# EAGLE board GrblMainboard - v2.1 (EAGLE 6.3)
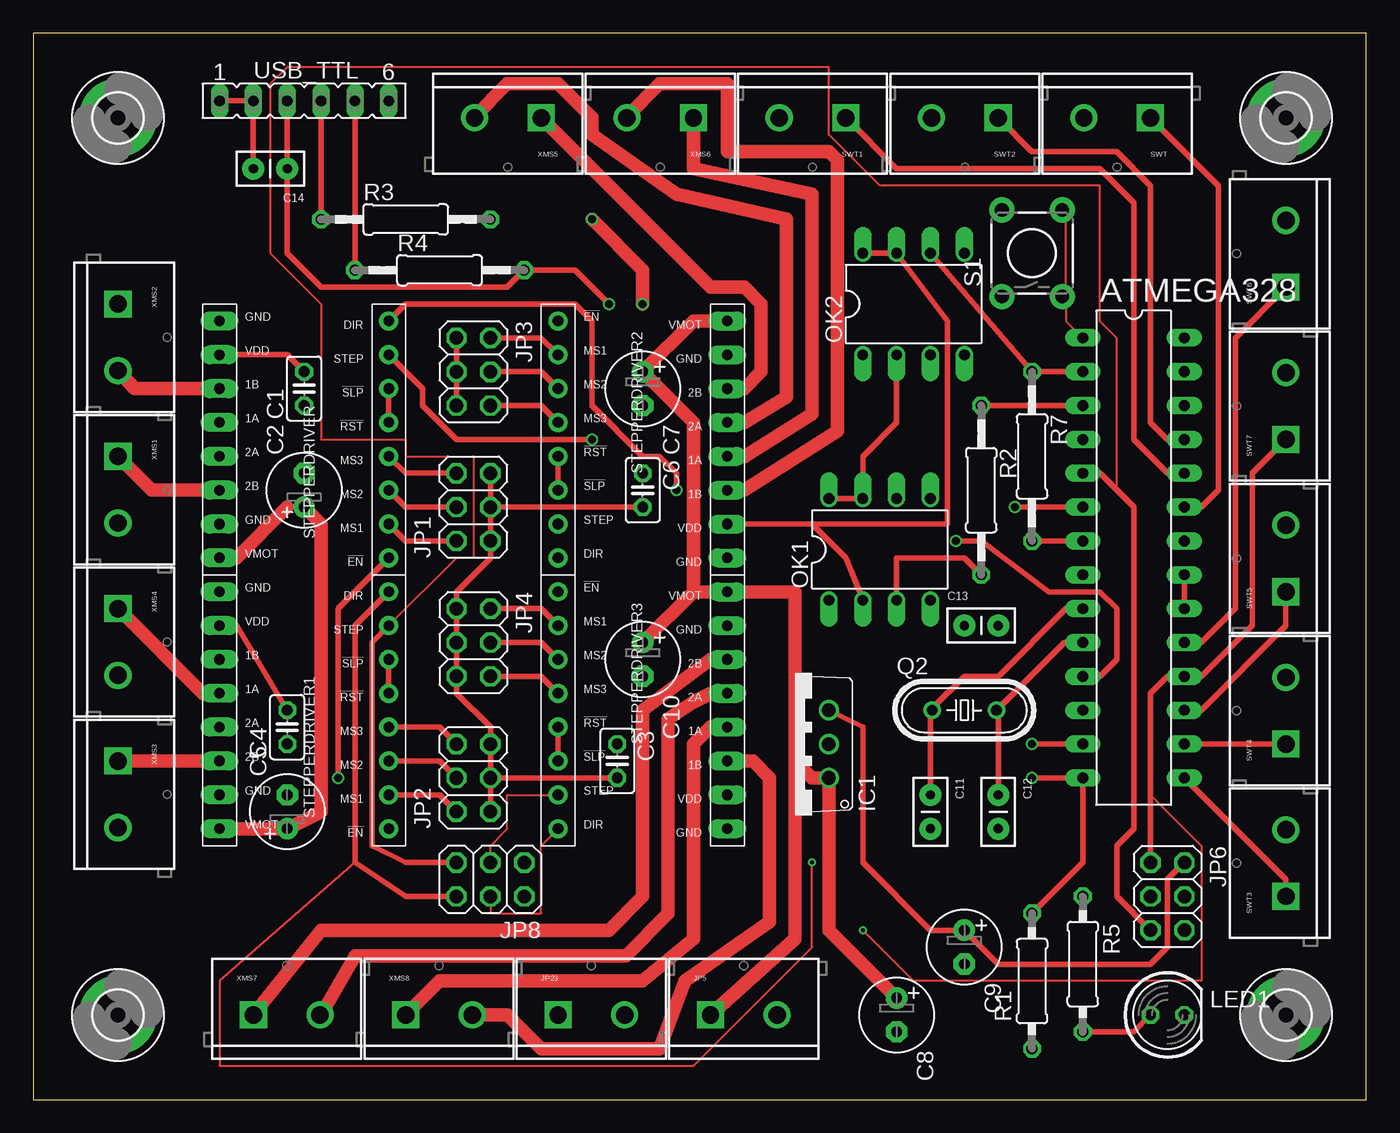
[diagram p0: board, top side]
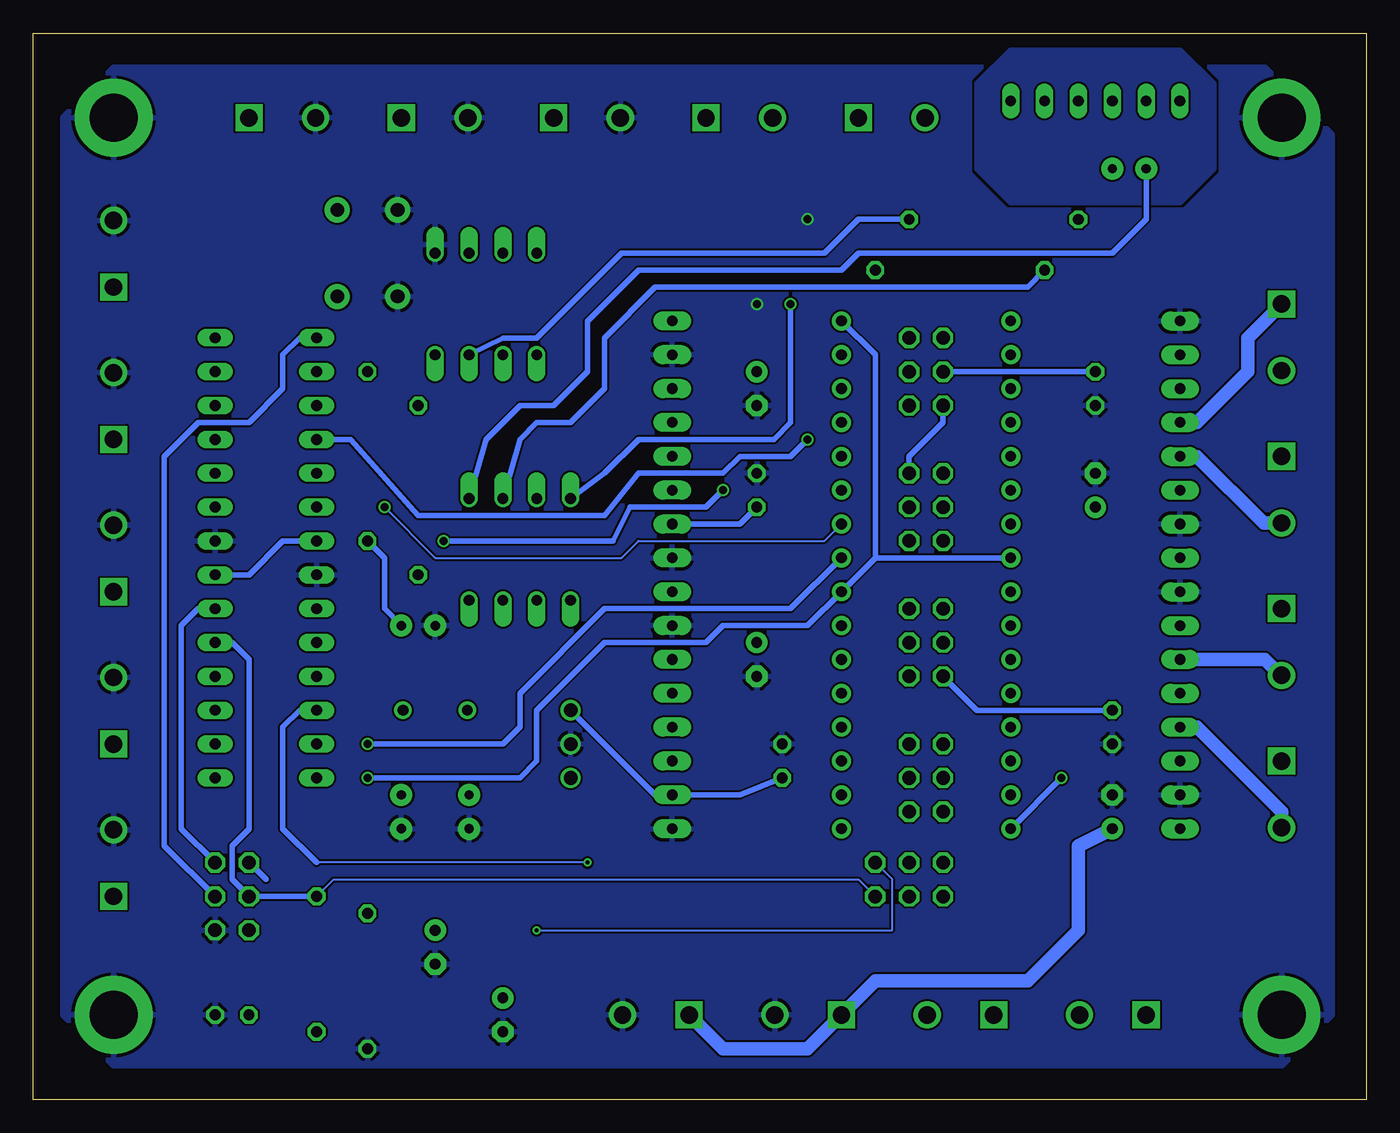
[diagram p1: board, bottom side, seen from below]

Size 100 x 80 mm. Coordinates in mm from the lower left corner, seen from the top.
Outline: 0,0 100,0 100,80 0,80 0,0
Copper layers (1*16): Top 0.035mm / dielectric 1.5mm / Bottom 0.035mm
Design rules "ITEADstudio_DRC": minimum track width 6mil, minimum drill 12mil, track to track 6mil, track to pad 6mil, pad to pad 6mil, via to via 6mil, smd to smd 0mil, copper to edge 10mil, drill to drill 10mil, minimum pad ring 10mil, minimum via ring 6mil, stop-mask expansion 2mil, vias tented up to drill 100mil, thermal gap 10mil

## Footprints (pad centres in the part's own frame; a part is rotated, then mirrored left to right if it is on the bottom)
DIL28-3 = drill 0.813 long: 1 -16.51,-3.81; 2 -13.97,-3.81; 3 -11.43,-3.81; 4 -8.89,-3.81; 5 -6.35,-3.81; 6 -3.81,-3.81; 7 -1.27,-3.81; 8 1.27,-3.81; 9 3.81,-3.81; 10 6.35,-3.81; 11 8.89,-3.81; 12 11.43,-3.81; 13 13.97,-3.81; 14 16.51,-3.81; 15 16.51,3.81; 16 13.97,3.81; 17 11.43,3.81; 18 8.89,3.81; 19 6.35,3.81; 20 3.81,3.81; 21 1.27,3.81; 22 -1.27,3.81; 23 -3.81,3.81; 24 -6.35,3.81; 25 -8.89,3.81; 26 -11.43,3.81; 27 -13.97,3.81; 28 -16.51,3.81
C025-025X050 = drill 0.813 octagon: 1 -1.27,0; 2 1.27,0
E2,5-6 = drill 0.813 pad 1.6: + -1.27,0 | drill 0.813 pad 1.6 octagon: - 1.27,0
CAP-PTH-SMALL2 = drill 0.7 pad 1.651: 1 0,0; 2 2.54,0
3,6-PAD = drill 3.6 pad 5.842: B3,6 0,0
78XXL-CUSTOM = drill 1.016: GND 0,0; IN -2.54,0; OUT 2.54,0
2X03 = drill 1.016 octagon: 1 -2.54,-1.27; 2 -2.54,1.27; 3 0,-1.27; 4 0,1.27; 5 2.54,-1.27; 6 2.54,1.27
SCREWTERMINAL-5MM-2 = drill 1.3 pad 2.032 square: 1 0,0 | drill 1.3 pad 2.032: 2 5,0
LED5MM = drill 0.813 octagon: A -1.27,0; K 1.27,0
DIL08 = drill 0.813 offset: 1 -3.81,-3.81; 2 -1.27,-3.81; 3 1.27,-3.81; 4 3.81,-3.81; 5 3.81,3.81; 6 1.27,3.81; 7 -1.27,3.81; 8 -3.81,3.81
HC49/S = drill 0.813: 1 -2.413,0; 2 2.413,0
0207/10 = drill 0.813 octagon: 1 -5.08,0; 2 5.08,0
0207/12 = drill 0.813 octagon: 1 -6.35,0; 2 6.35,0
TACTILE-PTH = drill 1.016 pad 1.88: 1 -3.251,2.261; 2 3.251,2.261; 3 -3.251,-2.261; 4 3.251,-2.261
POLOLU-ALLEGRO-PTH = drill 0.8 pad 1.422 long: 1A 6.35,-1.27; 1B 6.35,-3.81; 2A 6.35,1.27; 2B 6.35,3.81; GNDMOT 6.35,6.35; GNDVDD 6.35,-8.89; VDD 6.35,-6.35; VMOT 6.35,8.89 | drill 0.8 pad 1.422: !EN -6.35,8.89; !RST -6.35,-1.27; !SLP -6.35,-3.81; DIR -6.35,-8.89; MS1 -6.35,6.35; MS2 -6.35,3.81; MS3 -6.35,1.27; STEP -6.35,-6.35
FE06 = drill 0.813 long: 1 -6.35,0; 2 -3.81,0; 3 -1.27,0; 4 1.27,0; 5 3.81,0; 6 6.35,0

## Placement (x,y rotation side)
ATMEGA328  CONTROLLER  [DIL28-3]  82.55,40.64 270 top
C1  0.1uF  [C025-025X050]  20.32,53.34 90 top
C2  47uF  [E2,5-6]  20.32,45.72 90 top
C3  0.1uF  [C025-025X050]  43.81,25.4 270 top
C4  0.1uF  [C025-025X050]  19.05,27.94 90 top
C5  47uF  [E2,5-6]  19.05,21.59 90 top
C6  0.1uF  [C025-025X050]  45.72,45.72 270 top
C7  47uF  [E2,5-6]  45.72,53.34 270 top
C8  47uF  [E2,5-6]  64.77,6.35 270 top
C9  47uF  [E2,5-6]  69.85,11.43 270 top
C10  47uF  [E2,5-6]  45.72,33.02 270 top
C11  18pF  [CAP-PTH-SMALL2]  67.31,22.86 270 top
C12  18pF  [CAP-PTH-SMALL2]  72.39,22.86 270 top
C13  0.1uF  [CAP-PTH-SMALL2]  69.85,35.56 0 top
C14  0.1uF  [CAP-PTH-SMALL2]  19.05,69.85 180 top
H5  MOUNT-PAD-ROUND3.6  [3,6-PAD]  93.98,73.66 0 top
H6  MOUNT-PAD-ROUND3.6  [3,6-PAD]  6.35,6.35 0 top
H7  MOUNT-PAD-ROUND3.6  [3,6-PAD]  6.35,73.66 0 top
H8  MOUNT-PAD-ROUND3.6  [3,6-PAD]  93.98,6.35 0 top
IC1  LM7805  [78XXL-CUSTOM]  59.69,26.67 90 top
JP1  microstep  [2X03]  33.02,44.45 90 top
JP2  microstep  [2X03]  33.02,24.13 90 top
JP3  microstep  [2X03]  33.02,54.61 270 top
JP4  microstep  [2X03]  33.02,34.29 270 top
JP5  FAN_MOTOR  [SCREWTERMINAL-5MM-2]  50.8,6.35 0 top
JP6  ICSP  [2X03]  85.09,15.24 270 top
JP8  DualY  [2X03]  34.29,16.51 180 top
JP23  PWR SPLY  [SCREWTERMINAL-5MM-2]  39.37,6.35 0 top
LED1  Data  [LED5MM]  85.09,6.35 0 top
OK1  6N137  [DIL08]  63.5,41.27 0 top
OK2  6N137  [DIL08]  66.04,59.69 0 top
Q2  16 MHZ  [HC49/S]  69.85,29.21 0 top
R1  10k  [0207/10]  74.93,8.89 90 top
R2  470  [0207/12]  71.12,45.72 270 top
R3  470  [0207/12]  27.94,66.04 0 top
R4  470  [0207/12]  30.48,62.23 0 top
R5  1k  [0207/10]  78.74,10.16 270 top
R7  470  [0207/12]  74.93,48.26 270 top
S1  RESET  [TACTILE-PTH]  74.93,63.5 90 top
STEPPERDRIVER  POLOLU-A4988  [POLOLU-ALLEGRO-PTH]  20.32,49.53 180 top
STEPPERDRIVER1  POLOLU-A4988  [POLOLU-ALLEGRO-PTH]  20.32,29.21 180 top
STEPPERDRIVER2  POLOLU-A4988  [POLOLU-ALLEGRO-PTH]  45.72,49.53 0 top
STEPPERDRIVER3  POLOLU-A4988  [POLOLU-ALLEGRO-PTH]  45.72,29.21 0 top
SWT  G-RESET  [SCREWTERMINAL-5MM-2]  83.82,73.66 180 top
SWT1  FEED-HOLD  [SCREWTERMINAL-5MM-2]  60.96,73.66 180 top
SWT2  CYCLE-START  [SCREWTERMINAL-5MM-2]  72.39,73.66 180 top
SWT3  X-STOP  [SCREWTERMINAL-5MM-2]  93.98,15.24 90 top
SWT4  Y-STOP  [SCREWTERMINAL-5MM-2]  93.98,26.67 90 top
SWT5  Z-STOP  [SCREWTERMINAL-5MM-2]  93.98,38.1 90 top
SWT6  SPINDLE-DIR  [SCREWTERMINAL-5MM-2]  93.98,60.96 90 top
SWT7  SPINDLE-ENABLE  [SCREWTERMINAL-5MM-2]  93.98,49.53 90 top
USB_TTL  [FE06]  20.32,74.93 0 top
XMS1  MOT-1  [SCREWTERMINAL-5MM-2]  6.35,48.26 270 top
XMS2  MOT-2  [SCREWTERMINAL-5MM-2]  6.35,59.69 270 top
XMS3  MOT-1  [SCREWTERMINAL-5MM-2]  6.35,25.4 270 top
XMS4  MOT-2  [SCREWTERMINAL-5MM-2]  6.35,36.83 270 top
XMS5  MOT-1  [SCREWTERMINAL-5MM-2]  38.1,73.66 180 top
XMS6  MOT-2  [SCREWTERMINAL-5MM-2]  49.53,73.66 180 top
XMS7  MOT-1  [SCREWTERMINAL-5MM-2]  16.51,6.35 0 top
XMS8  MOT-2  [SCREWTERMINAL-5MM-2]  27.94,6.35 0 top

## Library data of the parts
ATMEGA328 = Bibsatmel; OC_FARNELL: unknown; OC_NEWARK: unknown
C1-C10 R1-R5 R7 = resistor
C11-C14 IC1 JP5 JP23 S1 SWT SWT1-SWT7 XMS1-XMS8 = SparkFun
H5-H8 = holes
JP1-JP4 JP6 JP8 = pinhead
LED1 = led
OK1 OK2 = optocoupler; MPN: 6N137; OC_FARNELL: 1328376; OC_NEWARK: 52M1895
Q2 = crystal; OC_FARNELL: 1667008; OC_NEWARK: unknown
STEPPERDRIVER STEPPERDRIVER1-STEPPERDRIVER3 = pololu-allegro
USB_TTL = con-lsta; OC_FARNELL: unknown; OC_NEWARK: unknown

## Nets
5V: ATMEGA328.7 ATMEGA328.20 ATMEGA328.21 C1.2 C3.2 C4.2 C6.2 C9.+ C13.2 IC1.OUT JP1.1 JP1.3 JP1.5 JP2.1 JP2.3 JP2.5 JP3.1 JP3.3 JP3.5 JP4.1 JP4.3 JP4.5 JP6.2 OK1.2 OK2.7 OK2.8 R7.2 STEPPERDRIVER1.VDD STEPPERDRIVER2.VDD STEPPERDRIVER3.VDD STEPPERDRIVER.VDD
12V: C2.+ C5.+ C7.+ C8.+ C10.+ IC1.IN JP5.1 JP23.1 STEPPERDRIVER1.VMOT STEPPERDRIVER2.VMOT STEPPERDRIVER3.VMOT STEPPERDRIVER.VMOT
A-DIR: JP8.4 STEPPERDRIVER3.DIR
A-STEP: JP8.3 STEPPERDRIVER3.STEP
AIFO: ATMEGA328.2 OK2.6 R7.1
AOFI: ATMEGA328.3 R2.1
COOLAND-MIST: ATMEGA328.27
COOLANT-FLOOD: ATMEGA328.26
CYCLE-START: ATMEGA328.25 SWT2.1
FEED-HOLD: ATMEGA328.24 SWT1.1
G-RESET: ATMEGA328.23 SWT.1
GND: ATMEGA328.8 ATMEGA328.22 C1.1 C2.- C3.1 C4.1 C5.- C6.1 C7.- C8.- C9.- C10.- C11.2 C12.2 C13.1 H5.B3,6 H6.B3,6 H7.B3,6 H8.B3,6 IC1.GND JP5.2 JP6.6 JP23.2 LED1.K OK2.5 R1.1 S1.1 S1.2 STEPPERDRIVER1.GNDMOT STEPPERDRIVER1.GNDVDD STEPPERDRIVER2.GNDMOT STEPPERDRIVER2.GNDVDD STEPPERDRIVER3.GNDMOT STEPPERDRIVER3.GNDVDD STEPPERDRIVER.GNDMOT STEPPERDRIVER.GNDVDD SWT1.2 SWT2.2 SWT3.2 SWT4.2 SWT5.2 SWT6.2 SWT7.2 SWT.2
GNDA: C14.2 OK1.5 USB_TTL.1 USB_TTL.2
MOTOR_DISABLE: ATMEGA328.14 R1.2 STEPPERDRIVER1.!EN STEPPERDRIVER2.!EN STEPPERDRIVER3.!EN STEPPERDRIVER.!EN
N$1: STEPPERDRIVER.2B XMS1.1
N$2: STEPPERDRIVER.2A XMS1.2
N$3: STEPPERDRIVER.1A XMS2.1
N$4: STEPPERDRIVER.1B XMS2.2
N$5: STEPPERDRIVER.!RST STEPPERDRIVER.!SLP
N$6: JP1.2 STEPPERDRIVER.MS1
N$7: JP1.4 STEPPERDRIVER.MS2
N$8: JP1.6 STEPPERDRIVER.MS3
N$9: STEPPERDRIVER1.2B XMS3.1
N$10: STEPPERDRIVER1.2A XMS3.2
N$11: STEPPERDRIVER1.1A XMS4.1
N$12: STEPPERDRIVER1.1B XMS4.2
N$13: STEPPERDRIVER1.!RST STEPPERDRIVER1.!SLP
N$14: JP2.2 STEPPERDRIVER1.MS1
N$15: JP2.4 STEPPERDRIVER1.MS2
N$16: JP2.6 STEPPERDRIVER1.MS3
N$17: STEPPERDRIVER2.2B XMS5.1
N$18: STEPPERDRIVER2.2A XMS5.2
N$19: STEPPERDRIVER2.1A XMS6.1
N$20: STEPPERDRIVER2.1B XMS6.2
N$21: STEPPERDRIVER2.!RST STEPPERDRIVER2.!SLP
N$22: JP3.2 STEPPERDRIVER2.MS1
N$23: JP3.4 STEPPERDRIVER2.MS2
N$24: JP3.6 STEPPERDRIVER2.MS3
N$25: STEPPERDRIVER3.2B XMS7.1
N$26: STEPPERDRIVER3.2A XMS7.2
N$27: STEPPERDRIVER3.1A XMS8.1
N$28: STEPPERDRIVER3.1B XMS8.2
N$29: STEPPERDRIVER3.!RST STEPPERDRIVER3.!SLP
N$30: JP4.2 STEPPERDRIVER3.MS1
N$31: JP4.4 STEPPERDRIVER3.MS2
N$32: JP4.6 STEPPERDRIVER3.MS3
N$33: ATMEGA328.9 C11.1 Q2.1
N$34: ATMEGA328.10 C12.1 Q2.2
N$35: OK2.3 R3.2
N$36: OK1.3 R2.2
N$37: LED1.A R5.2
RESET: ATMEGA328.1 JP6.4 S1.3 S1.4
SPINDLE-DIR: ATMEGA328.19 JP6.3 JP8.2 R5.1 SWT6.1
SPINDLE-ENABLE: ATMEGA328.18 JP6.1 JP8.1 SWT7.1
USB_5V: C14.1 OK1.7 OK1.8 OK2.2 R4.2 USB_TTL.3
USB_AIFO: OK1.6 R4.1 USB_TTL.5
USB_AOFI: R3.1 USB_TTL.4
X-DIR: ATMEGA328.11 STEPPERDRIVER.DIR
X-STEP: ATMEGA328.4 STEPPERDRIVER.STEP
X-STOP: ATMEGA328.15 SWT3.1
Y-DIR: ATMEGA328.12 JP8.6 STEPPERDRIVER1.DIR
Y-STEP: ATMEGA328.5 JP6.5 JP8.5 STEPPERDRIVER1.STEP
Y-STOP: ATMEGA328.16 SWT4.1
Z-DIR: ATMEGA328.13 STEPPERDRIVER2.DIR
Z-STEP: ATMEGA328.6 STEPPERDRIVER2.STEP
Z-STOP: ATMEGA328.17 SWT5.1

## Tracks (layer width: path | path; a pad name or v marks a point on that pad's centre or on a via)
5V
  Top 0.406: JP2.3 JP2.5 34.29,27.94 31.75,30.48 JP4.5 JP4.3 JP4.1 31.75,38.1 34.29,40.64 JP1.1 JP1.3 | JP2.3 JP2.1 | JP1.3 JP1.5 | JP3.5 JP3.3 JP3.1 | ATMEGA328.20 ATMEGA328.21 | STEPPERDRIVER1.VDD 15.24,35.56 C4.2 | STEPPERDRIVER.VDD 19.05,55.88 C1.2 | C6.2 JP1.3 | IC1.OUT 62.23,27.94 62.23,17.78 67.31,12.7 C9.+ 72.39,10.16 83.82,10.16 85.09,11.43 85.09,16.51 JP6.2 | JP2.3 C3.2 | R7.2 ATMEGA328.7 | STEPPERDRIVER2.VDD 58.42,43.18 | OK2.8 OK2.7 68.58,58.42 68.58,43.18 58.42,43.18 | OK1.2 60.96,40.64 58.42,43.18
  Bottom 0.406: JP1.5 34.29,48.26 31.75,50.8 JP3.5 | C3.2 46.99,22.86 STEPPERDRIVER3.VDD 53.34,22.86 IC1.OUT | STEPPERDRIVER2.VDD 46.99,43.18 C6.2 | JP6.2 88.9,20.32 88.9,35.56 87.63,36.83 ATMEGA328.20 | ATMEGA328.7 81.28,41.91 83.82,39.37 ATMEGA328.21 | C13.2 73.66,36.83 73.66,40.64 R7.2 | C1.2 JP3.3 | C4.2 29.21,29.21 JP4.5
12V
  Top 0.406: STEPPERDRIVER.VMOT 15.24,40.64 | 19.05,44.45 C2.+
  Top 1.016: STEPPERDRIVER1.VMOT C5.+ 21.59,21.59 21.59,43.18 C2.+ | C10.+ 49.53,38.1 | 49.53,38.1 STEPPERDRIVER3.VMOT 57.15,38.1 57.15,25.4 | JP5.1 57.15,12.06 57.15,25.4 | C8.+ 59.69,12.7 IC1.IN 58.42,24.13 57.15,25.4 | STEPPERDRIVER2.VMOT 49.53,58.42 C7.+ 49.53,50.8 49.53,38.1 | 15.24,40.64 19.05,44.45
  Bottom 1.016: JP5.1 48.26,3.81 41.91,3.81 JP23.1 36.83,8.89 25.4,8.89 21.59,12.7 21.59,19.05 C5.+
A-DIR
  Top 0.152: STEPPERDRIVER3.DIR 38.1,19.05 38.1,13.97 34.29,13.97 JP8.4
A-STEP
  Top 0.152: STEPPERDRIVER3.STEP 35.56,22.86 35.56,20.32 34.29,19.05 JP8.3
AIFO
  Top 0.406: ATMEGA328.2 R7.1 OK2.6
AOFI
  Top 0.406: ATMEGA328.3 R2.1
CYCLE-START
  Top 0.406: ATMEGA328.25 85.09,49.53 83.82,50.8 83.82,68.58 81.28,71.12 74.93,71.12 SWT2.1
FEED-HOLD
  Top 0.406: SWT1.1 64.77,69.85 80.01,69.85 82.55,67.31 82.55,49.53 85.09,46.99 ATMEGA328.24
G-RESET
  Top 0.406: SWT.1 88.9,68.58 88.9,45.72 87.63,44.45 ATMEGA328.23
GND  (via drill 0.6)
  Top 1.016: v45.72,59.69 45.72,62.23 v41.91,66.04
  pour Bottom (rank 2): 7.62,77.47 2.54,72.39 2.54,6.35 6.35,2.54 93.98,2.54 97.79,6.35 97.79,73.66 93.98,77.47
GNDA
  Top 0.406: USB_TTL.1 USB_TTL.2 C14.2
  Bottom 0.406: OK1.5 66.04,49.53 63.5,52.07 60.96,52.07 58.42,54.61 58.42,58.42 54.61,62.23 39.37,62.23 38.1,63.5 19.05,63.5 16.51,66.04 C14.2
MOTOR_DISABLE  (via drill 0.6)
  Top 0.406: R1.2 78.74,17.78 ATMEGA328.14 v74.93,24.13 | STEPPERDRIVER.!EN 22.86,36.83 v22.86,24.13
  Bottom 0.406: v22.86,24.13 STEPPERDRIVER1.!EN | STEPPERDRIVER.!EN 36.83,40.64 | 36.83,40.64 STEPPERDRIVER3.!EN 41.91,35.56 48.26,35.56 49.53,34.29 57.15,34.29 62.23,29.21 62.23,25.4 63.5,24.13 v74.93,24.13 | 36.83,40.64 36.83,55.88 STEPPERDRIVER2.!EN
N$1
  Top 1.016: XMS1.1 8.89,45.72 STEPPERDRIVER.2B
N$2
  Bottom 0.406: 12.7,48.26 STEPPERDRIVER.2A
  Bottom 1.016: XMS1.2 7.7,43.26 12.7,48.26
N$3
  Bottom 0.406: 12.7,50.8 STEPPERDRIVER.1A
  Bottom 1.016: XMS2.1 8.89,57.15 8.89,54.61 12.7,50.8
N$4
  Top 1.016: XMS2.2 7.62,53.34 STEPPERDRIVER.1B
N$5
  Top 0.406: STEPPERDRIVER.!SLP STEPPERDRIVER.!RST
N$6
  Top 0.406: JP1.2 27.94,41.91 STEPPERDRIVER.MS1
N$7
  Top 0.406: JP1.4 27.94,44.45 STEPPERDRIVER.MS2
N$8
  Top 0.406: JP1.6 27.94,46.99 STEPPERDRIVER.MS3
N$9
  Top 1.016: XMS3.1 STEPPERDRIVER1.2B
N$10
  Bottom 0.406: 12.7,27.94 STEPPERDRIVER1.2A
  Bottom 1.016: XMS3.2 6.35,21.59 12.7,27.94
N$11
  Top 0.406: 12.7,30.48 STEPPERDRIVER1.1A
  Top 1.016: XMS4.1 12.7,30.48
N$12
  Bottom 0.406: 13.89,33.1 STEPPERDRIVER1.1B | XMS4.2 6.43,31.83
  Bottom 1.016: 6.43,31.83 7.62,33.02 STEPPERDRIVER1.1B
N$13
  Top 0.406: STEPPERDRIVER1.!RST STEPPERDRIVER1.!SLP
N$14
  Top 0.406: JP2.2 30.48,22.86 STEPPERDRIVER1.MS1
N$15
  Top 0.406: STEPPERDRIVER1.MS2 30.48,25.4 JP2.4
N$16
  Top 0.406: STEPPERDRIVER1.MS3 30.48,27.94 JP2.6
N$17
  Top 0.406: 53.34,53.34 STEPPERDRIVER2.2B
  Top 1.016: 53.34,53.34 54.61,54.61 54.61,59.69 53.34,60.96 50.8,60.96 XMS5.1
N$18
  Top 0.406: XMS5.2 33.1,73.74 | 53.34,50.8 STEPPERDRIVER2.2A
  Top 1.016: 33.1,73.74 35.56,76.2 39.37,76.2 41.91,73.66 41.91,72.39 48.26,67.94 56.52,66.04 56.52,52.7 53.34,50.8
N$19
  Top 0.406: 53.34,48.26 STEPPERDRIVER2.1A
  Top 1.016: XMS6.1 49.53,69.85 58.42,67.94 58.42,51.44 53.34,48.26
N$20
  Top 0.406: XMS6.2 44.53,73.74 | 53.34,45.72 STEPPERDRIVER2.1B
  Top 1.016: 44.53,73.74 46.99,76.2 52.07,76.2 52.07,71.12 59.69,71.12 60.33,70.48 60.33,50.16 53.34,45.72
N$21
  Top 0.406: STEPPERDRIVER2.!RST STEPPERDRIVER2.!SLP
N$22
  Top 0.406: STEPPERDRIVER2.MS1 38.1,57.15 JP3.2
N$23
  Top 0.406: JP3.4 38.1,54.61 STEPPERDRIVER2.MS2
N$24
  Top 0.406: JP3.6 38.1,52.07 STEPPERDRIVER2.MS3
N$25
  Top 0.406: 50.8,33.02 STEPPERDRIVER3.2B
  Top 1.016: XMS7.1 21.59,12.7 43.18,12.7 45.72,15.24 45.72,29.21 50.8,33.02
N$26
  Top 0.406: XMS7.2 21.59,6.35 | 50.8,30.48 STEPPERDRIVER3.2A
  Top 1.016: 21.59,6.35 24.13,10.79 44.45,10.79 47.62,13.97 47.62,28.57 49.53,29.84 50.8,30.48
N$27
  Top 0.406: 50.8,27.94 STEPPERDRIVER3.1A
  Top 1.016: XMS8.1 30.48,8.89 45.72,8.89 49.53,12.06 49.53,26.67 50.8,27.94
N$28
  Top 1.016: STEPPERDRIVER3.1B 53.98,25.4 55.24,24.13 55.24,13.34 48.9,8.89 46.99,3.81 38.1,3.81 35.56,6.35 XMS8.2
N$29
  Top 0.406: STEPPERDRIVER3.!RST STEPPERDRIVER3.!SLP
N$30
  Top 0.406: JP4.2 38.1,36.83 STEPPERDRIVER3.MS1
N$31
  Top 0.406: JP4.4 38.1,34.29 STEPPERDRIVER3.MS2
N$32
  Top 0.406: JP4.6 38.1,31.75 STEPPERDRIVER3.MS3
N$33
  Top 0.406: C11.1 67.31,29.08 Q2.1 67.44,29.34 69.85,31.75 72.39,31.75 77.47,36.83 ATMEGA328.9
N$34
  Top 0.406: C12.1 72.39,29.08 Q2.2 77.34,34.29 ATMEGA328.10
N$35
  Bottom 0.406: OK2.3 64.77,57.15 62.23,57.15 55.88,63.5 40.64,63.5 38.1,66.04 R3.2
N$36
  Top 0.406: OK1.3 64.77,40.64 69.85,40.64 R2.2
N$37
  Top 0.406: R5.2 82.55,5.08 LED1.A
RESET
  Top 0.152: ATMEGA328.1 77.47,58.42 77.47,59.69 S1.3 77.47,60.96 77.47,66.04 S1.4
  Bottom 0.152: 80.01,57.15 ATMEGA328.1
  Bottom 0.406: JP6.4 90.17,19.05 90.17,48.26 87.63,50.8 83.82,50.8 81.28,53.34 81.28,55.88 80.01,57.15
SPINDLE-DIR
  Top 0.406: SWT6.1 90.17,57.15 90.17,36.83 87.63,34.29 ATMEGA328.19
  Bottom 0.152: JP8.2 38.1,16.51 77.47,16.51 R5.1
  Bottom 0.406: ATMEGA328.19 85.09,34.29 83.82,33.02 83.82,20.32 85.09,19.05 85.09,16.51 JP6.3 R5.1
SPINDLE-ENABLE  (via drill 0.3)
  Top 0.152: v62.23,12.7 66.04,8.89 87.63,8.89 87.63,19.05 83.82,22.86
  Top 0.406: SWT7.1 91.44,46.99 91.44,35.56 87.63,31.75 ATMEGA328.18 85.09,31.75 83.82,30.48 83.82,22.86 JP6.1
  Bottom 0.152: JP8.1 35.56,16.51 35.56,12.7 v62.23,12.7
  Bottom 0.406: 82.55,16.51 JP6.1
USB_5V  (via drill 0.6)
  Top 0.406: OK2.2 64.77,50.8 62.23,48.26 OK1.7 OK1.8 | USB_TTL.3 C14.1 19.05,63.5 21.59,60.96 35.56,60.96 R4.2 40.64,62.23 v43.18,59.69
  Bottom 0.406: v43.18,59.69 43.18,50.8 44.45,49.53 54.61,49.53 57.15,46.99 OK1.8
USB_AIFO
  Top 0.406: USB_TTL.5 R4.1
  Bottom 0.406: OK1.6 63.5,49.53 62.23,50.8 59.69,50.8 57.15,53.34 57.15,57.15 53.34,60.96 25.4,60.96 R4.1
USB_AOFI
  Top 0.406: USB_TTL.4 R3.1
USB_GND
  pour Bottom: 26.67,78.74 29.21,76.2 29.21,69.85 26.67,67.31 13.97,67.31 11.43,69.85 11.43,76.2 13.97,78.74
X-DIR  (via drill 0.6)
  Top 0.406: STEPPERDRIVER.DIR 27.94,59.69 40.64,59.69 41.91,58.42 41.91,52.07 45.72,48.26 46.99,48.26 48.26,46.99 v48.26,45.72 | v69.22,41.91 71.12,41.91 76.2,38.1 80.01,38.1 81.28,36.83 81.28,33.02 80.01,31.75 ATMEGA328.11
  Bottom 0.406: v48.26,45.72 49.53,44.45 55.24,44.45 56.52,41.91 v69.22,41.91
X-STEP  (via drill 0.6)
  Top 0.406: v41.91,49.53 31.75,49.53 29.21,52.07 29.21,53.34 STEPPERDRIVER.STEP
  Bottom 0.406: ATMEGA328.4 76.2,49.53 71.12,43.81 57.15,43.81 54.61,46.99 48.26,46.99 46.99,48.26 43.18,48.26 v41.91,49.53
X-STOP
  Top 0.406: SWT3.1 93.98,16.51 ATMEGA328.15
Y-DIR  (via drill 0.3)
  Top 0.152: v58.42,17.78 58.42,11.43 49.53,2.54 13.97,2.54 13.97,8.89 24.13,17.78
  Top 0.406: JP8.6 27.94,15.24 24.13,17.78 24.13,35.56 STEPPERDRIVER1.DIR
  Bottom 0.152: v58.42,17.78 78.74,17.78
  Bottom 0.406: 78.74,17.78 81.28,20.32 81.28,27.94 80.01,29.21 ATMEGA328.12
Y-STEP
  Top 0.152: STEPPERDRIVER1.STEP 31.75,40.64 33.02,40.64 33.02,48.26 27.94,48.26 27.94,49.53 21.59,49.53 21.59,59.69 17.78,63.5 17.78,76.2 19.05,77.47 59.69,77.47 59.69,72.39 63.5,68.58 80.01,68.58 80.01,58.42 81.28,57.15 81.28,45.72
  Top 0.406: STEPPERDRIVER1.STEP 25.4,34.29 25.4,19.05 27.94,17.78 JP8.5 | JP6.5 81.28,15.24 81.28,19.05 82.55,20.32 82.55,44.45 81.28,45.72 80.01,46.99 ATMEGA328.5
Y-STOP
  Top 0.406: SWT4.1 ATMEGA328.16
Z-DIR  (via drill 0.6)
  Top 0.406: v74.93,26.67 ATMEGA328.13
  Bottom 0.406: v74.93,26.67 64.77,26.67 63.5,27.94 63.5,30.48 57.15,36.83 43.18,36.83 STEPPERDRIVER2.DIR
Z-STEP  (via drill 0.6)
  Top 0.406: v73.66,44.45 ATMEGA328.6
  Bottom 0.152: STEPPERDRIVER2.STEP 40.64,41.91 54.61,41.91 55.88,40.64 69.85,40.64 v73.66,44.45
Z-STOP
  Top 0.406: SWT5.1 93.98,35.56 87.63,29.21 ATMEGA328.17